# EAGLE board semaforo-circuito (EAGLE 9.7.0)

Size 82.4 x 101.24 mm. Coordinates in mm from the lower left corner, seen from the top.
Outline: 0,0 82.4,0 82.4,101.24 0,101.24 0,0
Copper layers (1*16): Top 0.035mm / dielectric 1.5mm / Bottom 0.035mm
Design rules "default": minimum track width 6mil, minimum drill 0.35mm, track to track 6mil, track to pad 6mil, pad to pad 6mil, via to via 6mil, smd to smd 6mil, copper to edge 40mil, drill to drill 6mil, minimum pad ring 10mil, minimum via ring 8mil, stop-mask expansion 4mil, vias tented up to drill 0mil, thermal gap 10mil

## Footprints (pad centres in the part's own frame; a part is rotated, then mirrored left to right if it is on the bottom)
LEDRD254W60D565H860B_G = drill 0.981 pad 1.581: 1 -1.27,0; 2 1.27,0
LEDRD254W60D565H860B_Y = drill 0.981 pad 1.581: 1 -1.27,0; 2 1.27,0
LEDRD254W60D565H860B = drill 0.981 pad 1.581: 1 -1.27,0; 2 1.27,0
RESAD1016W63L850D250B = drill 0.83 pad 1.43: 1 -5.08,0; 2 5.08,0
SWITCH-SPDT-PTH-8.5X3.7MM = drill 1.016 pad 1.88: 1 -2.54,0; 2 0,0; 3 2.54,0
ARDUINO-UNO-R3-SHIELD = drill 1.016 pad 1.88: 3.3V 24.13,-2.54; 5V 24.13,0; A0 24.13,12.7; A1 24.13,15.24; A2 24.13,17.78; A3 24.13,20.32; A4 24.13,22.86; A5 24.13,25.4; AREF -24.13,-13.97; D2 -24.13,20.32; D3 -24.13,17.78; D4 -24.13,15.24; D5 -24.13,12.7; D6 -24.13,10.16; D7 -24.13,7.62; D8 -24.13,3.81; D9 -24.13,1.27; D10 -24.13,-1.27; D11 -24.13,-3.81; D12 -24.13,-6.35; D13 -24.13,-8.89; GND@0 24.13,2.54; GND@1 24.13,5.08; GND@2 -24.13,-11.43; IOREF 24.13,-7.62; NC 24.13,-10.16; RES 24.13,-5.08; RX -24.13,25.4; SCL -24.13,-19.05; SDA -24.13,-16.51; TX -24.13,22.86; VIN 24.13,7.62

## Placement (x,y rotation side)
D1  GREEN  [LEDRD254W60D565H860B_G]  59.69,16.59 180 top
D2  YELLOW  [LEDRD254W60D565H860B_Y]  64.77,16.59 180 top
D3  RED  [LEDRD254W60D565H860B]  69.85,16.59 180 top
R2  220  [RESAD1016W63L850D250B]  68.58,8.97 90 top
R3  220  [RESAD1016W63L850D250B]  63.5,8.97 90 top
R4  220  [RESAD1016W63L850D250B]  58.42,8.97 90 top
S1  TOGGLE  [SWITCH-SPDT-PTH-8.5X3.7MM]  15.24,19.13 0 top
S2  TOGGLE  [SWITCH-SPDT-PTH-8.5X3.7MM]  22.86,19.13 0 top
S3  TOGGLE  [SWITCH-SPDT-PTH-8.5X3.7MM]  30.48,19.13 0 top
U1  ARDUINO-UNO-R3-SHIELD  [ARDUINO-UNO-R3-SHIELD]  47.88,71.39 270 top

## Library data of the parts
D1 = Tinkercad; CATEGORY: Opto-Electronic; SUB-CATEGORY: LED; VALUE: LED_GREEN
D2 = Tinkercad; CATEGORY: Opto-Electronic; SUB-CATEGORY: LED; VALUE: LED_YELLOW
D3 = Tinkercad; CATEGORY: Opto-Electronic; SUB-CATEGORY: LED; VALUE: LED_RED
R2-R4 S1-S3 U1 = Tinkercad

## Nets
D1_C: D1.2 R4.2
D2_C: D2.2 R3.2
D3_C: D3.2 R2.2
U1_A0: D1.1 U1.A0
U1_A2: D2.1 U1.A2
U1_A4: D3.1 U1.A4
U1_GND: R2.1 R3.1 R4.1 U1.GND@0 U1.GND@1 U1.GND@2

## Tracks (layer width: path | path; a pad name or v marks a point on that pad's centre or on a via)
D1_C  (1 unrouted)
D2_C  (1 unrouted)
D3_C  (1 unrouted)
U1_A0  (1 unrouted)
U1_A2  (1 unrouted)
U1_A4  (1 unrouted)
U1_GND  (5 unrouted)